# EAGLE board wfipic32host (EAGLE 9.6.2)
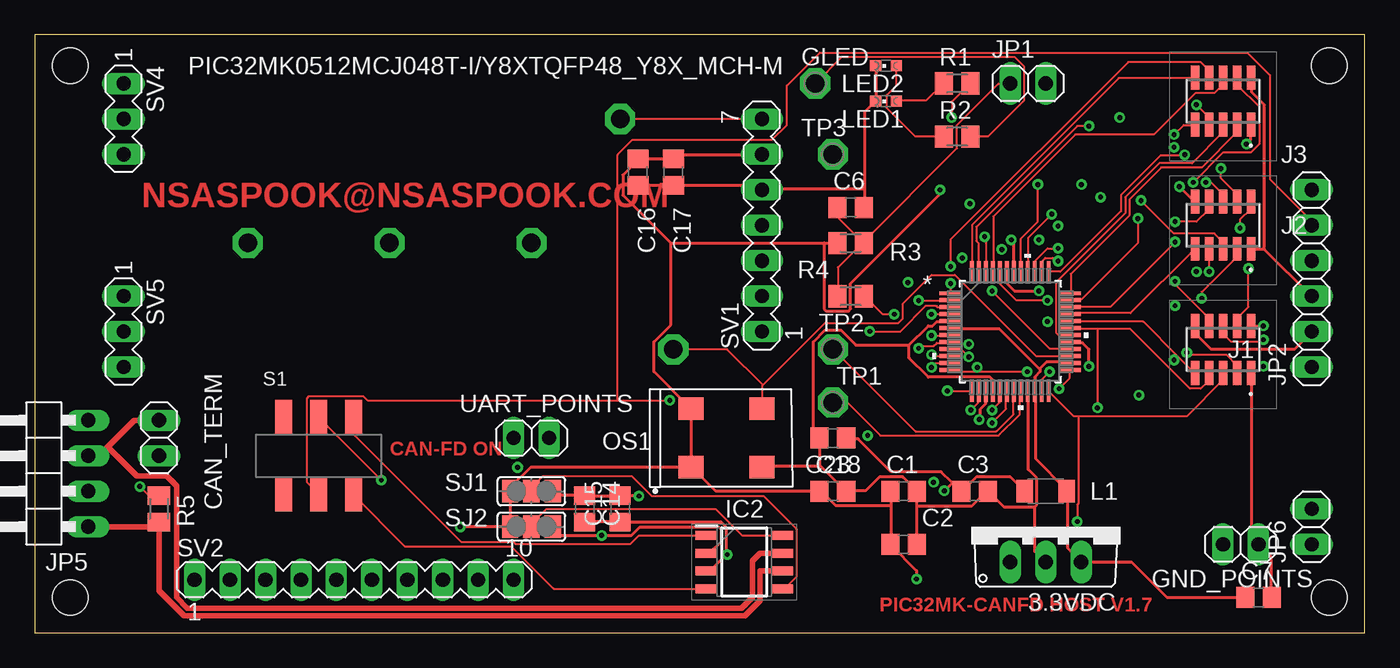
[diagram p0: board, top side]
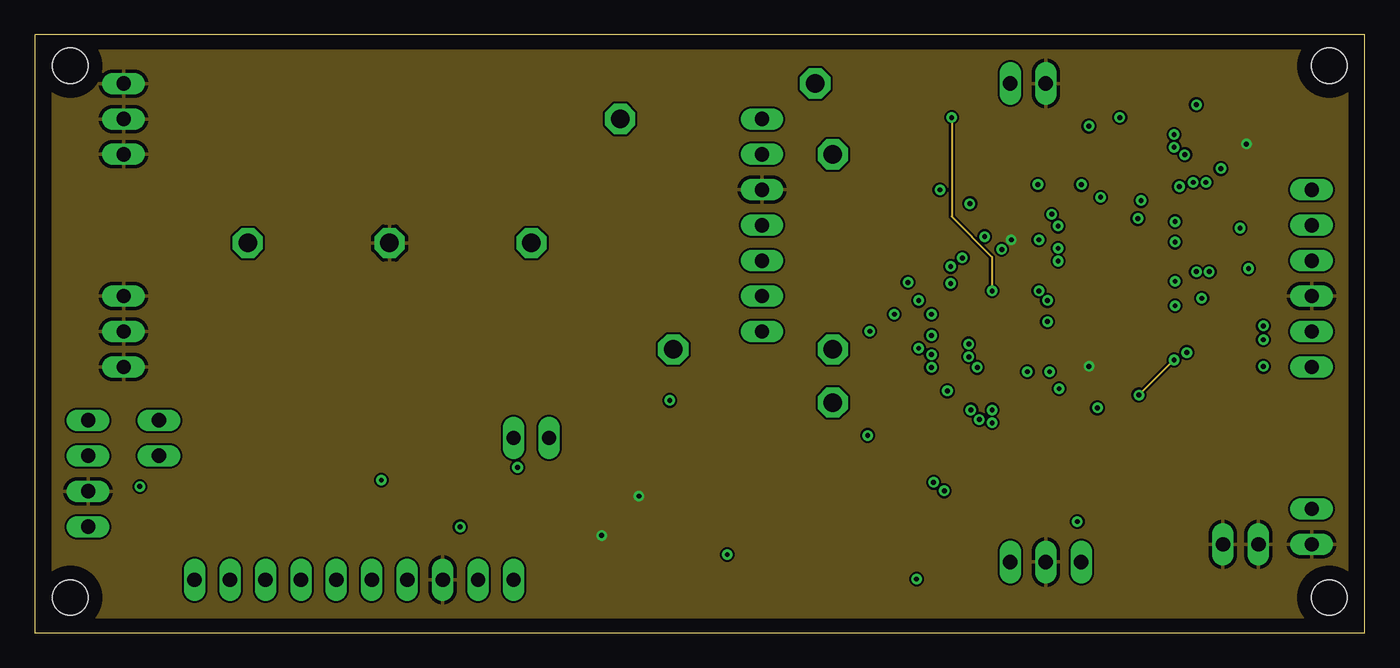
[diagram p1: board, inner layer Route2]
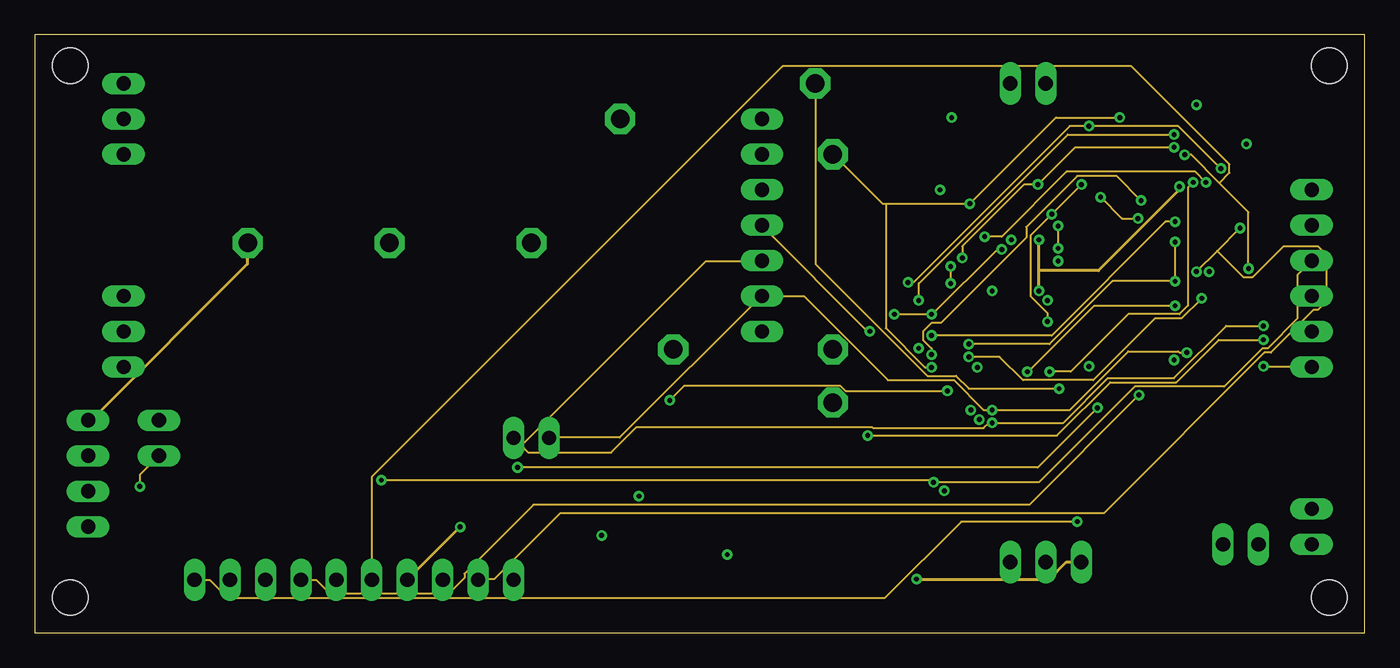
[diagram p2: board, inner layer Route15]
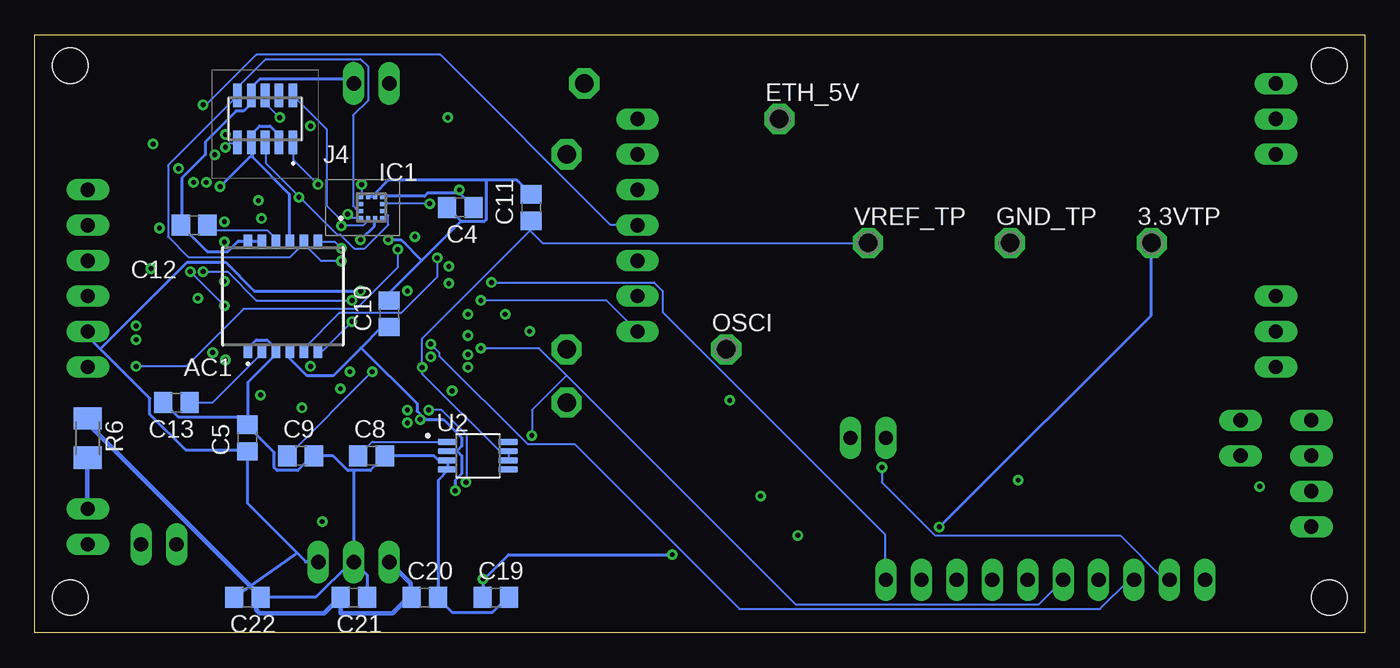
[diagram p3: board, bottom side, seen from below]

Size 95.23 x 42.85 mm. Coordinates in mm from the lower left corner, seen from the top.
Outline: 0,0 95.23,0 95.23,42.85 0,42.85 0,0
Copper layers (1+2*15+16): Top 0.035mm / dielectric 1.5mm / Route2 0.035mm / dielectric 0.15mm / Route15 0.035mm / dielectric 0.2mm / Bottom 0.035mm
Design rules "default *": minimum track width 6mil, minimum drill 0.35mm, track to track 6mil, track to pad 6mil, pad to pad 6mil, via to via 6mil, smd to smd 6mil, copper to edge 40mil, drill to drill 6mil, minimum pad ring 10mil, minimum via ring 8mil, stop-mask expansion 4mil, vias tented up to drill 0mil, thermal gap 10mil
Net classes: 1 icurrent: width 0.305 mm; 2 ncurrent: width 0.203 mm; 3 diff_can: width 0.051 mm
Holes 2.54 mm at 2.54,2.54 2.54,40.64 92.71,40.64 92.71,2.54
vRestrict: area 73.7,20.3 to 81.3,27.9; area 69.8,29.2 to 72.4,31.8; area 62.2,11.4 to 64.8,14; area 16.5,8.9 to 24.1,16.5

## Footprints (pad centres in the part's own frame; a part is rotated, then mirrored left to right if it is on the bottom)
TO220V = drill 1.016 long: 1 -2.54,-2.54; 2 0,-2.54; 3 2.54,-2.54
P1-13 = drill 1.321 pad 2.159 octagon: TP 0,0
SCA3300 = smd 0.61 x 0.98: 1 -2.5,-3.935; 2 -1.5,-3.935; 3 -0.5,-3.935; 4 0.5,-3.935; 5 1.5,-3.935; 6 2.5,-3.935; 7 2.5,3.935; 8 1.5,3.935; 9 0.5,3.935; 10 -0.5,3.935; 11 -1.5,3.935; 12 -2.5,3.935
C0805 = smd 1.3 x 1.5: 1 -0.95,0; 2 0.95,0
1X02 = drill 1.016 long: 1 -1.27,0; 2 1.27,0
BMA490L = smd 0.3 x 0.35: 1 -0.75,-0.775; 2 -0.25,-0.775; 3 0.25,-0.775; 4 0.75,-0.775; 7 0.75,0.775; 8 0.25,0.775; 9 -0.25,0.775; 10 -0.75,0.775 | smd 0.35 x 0.3: 5 0.775,-0.25; 6 0.775,0.25; 11 -0.775,0.25; 12 -0.775,-0.25
SOIC127P600X175-8N = smd 1.528 x 0.65: 1 -2.711,1.905; 2 -2.711,0.635; 3 -2.711,-0.635; 4 -2.711,-1.905; 5 2.711,-1.905; 6 2.711,-0.635; 7 2.711,0.635; 8 2.711,1.905
MLE-105-01-G-DV = smd 0.61 x 1.709: 1 2,-1.685; 2 2,1.685; 3 1,-1.685; 4 1,1.685; 5 0,-1.685; 6 0,1.685; 7 -1,-1.685; 8 -1,1.685; 9 -2,-1.685; 10 -2,1.685
1X06 = drill 1.016 long: 1 -6.35,0; 2 -3.81,0; 3 -1.27,0; 4 1.27,0; 5 3.81,0; 6 6.35,0
1X04/90 = drill 1.016 long: 1 -3.81,-3.81; 2 -1.27,-3.81; 3 1.27,-3.81; 4 3.81,-3.81
L3216C = smd 1.2 x 1.6: 1 -1.5,0; 2 1.5,0
CHIPLED_0603 = smd 0.8 x 0.8: A 0,-0.75; C 0,0.75
7.2X5.2-4-PAD = smd 1.8 x 1.6: 1 -2.54,-2.1; 2 2.54,-2.1; 3 2.54,2.1; 4 -2.54,2.1
M0805 = smd 1.3 x 1.6: 1 -0.95,0; 2 0.95,0
M1206 = smd 1.6 x 2: 1 -1.4,0; 2 1.4,0
SW_JS202011SCQN = smd 1.2 x 2.5: 1 -2.5,-2.75; 2 0,-2.75; 3 2.5,-2.75; 4 -2.5,2.75; 5 0,2.75; 6 2.5,2.75
SJ_2 = smd 1.168 x 1.6: 1 -1.524,0; 2 0,0; 3 1.524,0
MA07-1 = drill 1.016 long: 1 -7.62,0; 2 -5.08,0; 3 -2.54,0; 4 0,0; 5 2.54,0; 6 5.08,0; 7 7.62,0
MA10-1 = drill 1.016 long: 1 -11.43,0; 2 -8.89,0; 3 -6.35,0; 4 -3.81,0; 5 -1.27,0; 6 1.27,0; 7 3.81,0; 8 6.35,0; 9 8.89,0; 10 11.43,0
MA03-1 = drill 1.016 long: 1 -2.54,0; 2 0,0; 3 2.54,0
TQFP48_Y8X_MCH-M = smd 1.549 x 0.279: 1 -4.28,2.75; 2 -4.28,2.25; 3 -4.28,1.75; 4 -4.28,1.25; 5 -4.28,0.75; 6 -4.28,0.25; 7 -4.28,-0.25; 8 -4.28,-0.75; 9 -4.28,-1.25; 10 -4.28,-1.75; 11 -4.28,-2.25; 12 -4.28,-2.75; 25 4.28,-2.75; 26 4.28,-2.25; 27 4.28,-1.75; 28 4.28,-1.25; 29 4.28,-0.75; 30 4.28,-0.25; 31 4.28,0.25; 32 4.28,0.75; 33 4.28,1.25; 34 4.28,1.75; 35 4.28,2.25; 36 4.28,2.75 | smd 0.279 x 1.549: 13 -2.75,-4.28; 14 -2.25,-4.28; 15 -1.75,-4.28; 16 -1.25,-4.28; 17 -0.75,-4.28; 18 -0.25,-4.28; 19 0.25,-4.28; 20 0.75,-4.28; 21 1.25,-4.28; 22 1.75,-4.28; 23 2.25,-4.28; 24 2.75,-4.28; 37 2.75,4.28; 38 2.25,4.28; 39 1.75,4.28; 40 1.25,4.28; 41 0.75,4.28; 42 0.25,4.28; 43 -0.25,4.28; 44 -0.75,4.28; 45 -1.25,4.28; 46 -1.75,4.28; 47 -2.25,4.28; 48 -2.75,4.28
SOP65P490X110-8N = smd 1.42 x 0.47: 1 -2.165,0.975; 2 -2.165,0.325; 3 -2.165,-0.325; 4 -2.165,-0.975; 5 2.165,-0.975; 6 2.165,-0.325; 7 2.165,0.325; 8 2.165,0.975

## Placement (x,y rotation side)
3.3VDC  3.3 Vreg  [TO220V]  72.39,7.62 0 top
3.3VTP  PTR1PAD1-13  [P1-13]  15.24,27.94 0 bottom
AC1  SCA3300-D01-1  [SCA3300]  77.47,24.13 0 bottom
C1  0.1uf  [C0805]  62.23,10.16 0 top
C2  10uf  [C0805]  62.23,6.35 0 top
C3  0.1uf  [C0805]  67.31,10.16 0 top
C4  0.1uf  [C0805]  64.77,30.48 180 bottom
C5  0.1uf  [C0805]  80.01,13.97 90 bottom
C6  0.1uf  [C0805]  58.42,30.48 0 top
C7  10uf  [C0805]  87.63,2.54 0 top
C8  0.1uf  [C0805]  71.12,12.7 0 bottom
C9  0.1uf  [C0805]  76.2,12.7 0 bottom
C10  0.1uf  [C0805]  69.85,22.86 90 bottom
C11  10uf  [C0805]  59.69,30.48 90 bottom
C12  0.01uf  [C0805]  83.82,29.21 180 bottom
C13  0.01uf  [C0805]  85.09,16.51 180 bottom
C14  10uf  [C0805]  39.37,8.89 90 top
C15  0.1uf  [C0805]  41.91,8.89 90 top
C16  10uf  [C0805]  43.18,33.02 270 top
C17  0.1uf  [C0805]  45.72,33.02 270 top
C18  0.1uf  [C0805]  57.15,10.16 0 top
C19  0.1uf  [C0805]  62.23,2.54 0 bottom
C20  0.1uf  [C0805]  67.31,2.54 0 bottom
C21  10uf  [C0805]  72.39,2.54 0 bottom
C22  10uf  [C0805]  80.01,2.54 0 bottom
C23  10uf  [C0805]  57.15,13.97 180 top
CAN_TERM  can term  [1X02]  8.89,13.97 270 top
ETH_5V  PTR1PAD1-13  [P1-13]  41.91,36.83 0 bottom
GLED  PTR1PAD1-13  [P1-13]  55.88,39.37 0 top
GND_POINTS  GND_TEST  [1X02]  86.36,6.35 180 top
GND_TP  PTR1PAD1-13  [P1-13]  25.4,27.94 0 bottom
IC1  BMA490L  [BMA490L]  71.12,30.48 0 bottom
IC2  TCAN330GD  [SOIC127P600X175-8N]  50.8,5.08 0 top
J1  MLE-105-01-G-DV  [MLE-105-01-G-DV]  85.09,20.32 0 top
J2  MLE-105-01-G-DV  [MLE-105-01-G-DV]  85.09,29.21 0 top
J3  MLE-105-01-G-DV  [MLE-105-01-G-DV]  85.09,38.1 0 top
J4  MLE-105-01-G-DV  [MLE-105-01-G-DV]  78.74,36.83 0 bottom
JP1  RESET_JMP  [1X02]  71.12,39.37 0 top
JP2  ICSP  [1X06]  91.44,25.4 90 top
JP5  CAN-FD  [1X04/90]  0,11.43 90 top
JP6  DC12+  [1X02]  91.44,7.62 90 top
L1  100uh  [L3216C]  72.39,10.16 0 top
LED1  RED  [CHIPLED_0603]  60.96,38.1 90 top
LED2  GREEN  [CHIPLED_0603]  60.96,40.64 90 top
OS1  OSC-OE-CFPS-32  [7.2X5.2-4-PAD]  49.53,13.97 0 top
OSCI  PTR1PAD1-13  [P1-13]  45.72,20.32 0 bottom
R1  2k  [M0805]  66.04,39.37 0 top
R2  2k  [M0805]  66.04,35.56 0 top
R3  10k  [M0805]  58.42,27.94 180 top
R4  56  [M0805]  58.42,24.13 0 top
R5  120  [M0805]  8.89,8.89 90 top
R6  0 ohm fuse  [M1206]  91.44,13.97 270 bottom
S1  JS202011SCQN  [SW_JS202011SCQN]  20.32,12.7 0 top
SJ1  can_shdn  [SJ_2]  35.56,10.16 0 top
SJ2  can_s  [SJ_2]  35.56,7.62 0 top
SV1  ETH1  [MA07-1]  52.07,29.21 90 top
SV2  GLCD  [MA10-1]  22.86,3.81 0 top
SV4  ETHG  [MA03-1]  6.35,36.83 270 top
SV5  ETHG  [MA03-1]  6.35,21.59 270 top
TP1  PTR1PAD1-13  [P1-13]  57.15,16.51 0 top
TP2  PTR1PAD1-13  [P1-13]  57.15,20.32 0 top
TP3  PTR1PAD1-13  [P1-13]  57.15,34.29 0 top
U1  PIC32MK0512MCJ048T-I/Y8XTQFP48_Y8X_MCH-M  [TQFP48_Y8X_MCH-M]  69.85,21.59 0 top
U2  MAX6126B30  [SOP65P490X110-8N]  63.5,12.7 0 bottom
UART_POINTS  UART_TEST  [1X02]  35.56,13.97 0 top
VREF_TP  PTR1PAD1-13  [P1-13]  35.56,27.94 0 bottom

## Library data of the parts
3.3VDC = linear
3.3VTP ETH_5V GLED GND_TP OSCI TP1-TP3 VREF_TP = testpad
AC1 = SCA3300-D01-1; AVAILABILITY: In Stock; DESCRIPTION: Accelerometer X, Y, Z Axis ±1.5g, 3g, 6g - -; MF: Murata Electronics; MP: SCA3300-D01-1; PACKAGE: Nonstandard Murata; PRICE: None; PURCHASE-URL: https://pricing.snapeda.com/search/part/SCA3300-D01-1/?ref=eda
C1-C23 = rcl; SPICEPREFIX: C
CAN_TERM GND_POINTS JP1 JP2 JP5 JP6 UART_POINTS = pinhead
IC1 = SamacSys_Parts; DESCRIPTION: Accelerometers High-performance longevity acceleration sensor; HEIGHT: 1mm; MANUFACTURER_NAME: Bosch Sensortec; MANUFACTURER_PART_NUMBER: BMA490L; MOUSER_PART_NUMBER: 262-BMA490L; MOUSER_PRICE-STOCK: https://www.mouser.co.uk/ProductDetail/Bosch-Sensortec/BMA490L?qs=7MVldsJ5UawjTpioRTbJPQ%3D%3D
IC2 = TCAN330GD; DESCRIPTION: 3.3-V CAN Transceivers with CAN FD (Flexible Data Rate); HEIGHT: 1.75mm; MANUFACTURER_NAME: Texas Instruments; MANUFACTURER_PART_NUMBER: TCAN330GD; MOUSER_PART_NUMBER: 595-TCAN330GD; MOUSER_PRICE-STOCK: https://www.mouser.co.uk/ProductDetail/Texas-Instruments/TCAN330GD?qs=9DwIlvx97ae6H3qgocd9Aw%3D%3D
J1-J4 = MLE-105-01-G-DV; DESCRIPTION: 10 Position, 1.00 mm Tiger Beam&trade; Cost-Effective Single Beam Socket Strip; HEIGHT: mm; MANUFACTURER_NAME: SAMTEC; MANUFACTURER_PART_NUMBER: MLE-105-01-G-DV; MOUSER_PART_NUMBER: 200-MLE10501GDV; MOUSER_PRICE-STOCK: https://www.mouser.co.uk/ProductDetail/Samtec/MLE-105-01-G-DV?qs=rU5fayqh%252BE2dXiDvl4XeQQ%3D%3D
L1 = rcl; SPICEPREFIX: L
LED1 LED2 = led
OS1 = IQD-Frequency-Products
R1-R6 = rcl; SPICEPREFIX: R
S1 = JS202011SCQN_fixed; AVAILABILITY: Unavailable; DESCRIPTION: JS Series DPDT On-On Gull Wing Surface Mount Subminiature Slide Switch; MF: C&K; MP: JS202011SCQN; PACKAGE: None; PRICE: None
SJ1 SJ2 = jumper
SV1 SV2 SV4 SV5 = con-lstb; OC_FARNELL: unknown; OC_NEWARK: unknown
U1 = 2022-08-07_22-50-41_Library; COPYRIGHT: Copyright (C) 2022 Ultra Librarian. All rights reserved.; MANUFACTURER_PART_NUMBER: PIC32MK0512MCJ048T-I/Y8X; MFR_NAME: Microchip
U2 = MAX6126B30; DESCRIPTION: Series Voltage Reference IC Fixed 3V V ±0.1% 10 mA 8-uMAX-EP|8-uSOP-EP; DIGI-KEY_PART_NUMBER: MAX6126B30+T-ND; MF: Maxim Integrated; MP: MAX6126B30+T; PACKAGE: MICRO MAX-8 Maxim; PURCHASE-URL: https://pricing.snapeda.com/search/part/MAX6126B30+T/?ref=eda

## Nets
AN0: J2.3 U1.9
AN1: J2.5 U1.10
AVDD [ncurrent]: AC1.4 C3.1 C10.1 C23.1 L1.1 U1.15 U2.2
BMA_INT2: IC1.6 J4.6 TP3.TP U1.11
CAN_N [diff_can]: IC2.6 JP5.1 R5.1
CAN_P [diff_can]: CAN_TERM.1 IC2.7 JP5.3
DAC1: J2.9 U1.33
DC_IN [icurrent]: JP6.2 R6.2
DC_INPUT [icurrent]: 3.3VDC.1 C20.1 C21.1 R6.1
DIS_CS: J1.6 SV2.5 U1.8
DIS_MODE: J1.9 SV2.4 U1.32
DIS_RESET: J1.4 SV2.6 U1.37
EXT_INT2: IC1.5 J4.5 U1.35
EXT_SW2: J2.8 U1.7
GREEN_LED: GLED.TP R2.2 U1.25
IMU_CS: AC1.5 IC1.10 J4.9 U1.41
INDX2: J2.6 U1.46
MCLR_SIG: JP2.1 R4.2 U1.4
N$1: LED1.A R1.1
N$2: LED2.A R2.1
N$3: C6.1 JP1.1 R3.1 R4.1
N$4: C8.1 U2.1
N$5: TP1.TP U1.20
N$6: TP2.TP U1.19
N$7: AC1.10 C12.1
N$8: ETH_5V.TP SV1.7
N$9: AC1.2 C13.1
N$10: IC2.1 S1.6
N$11: IC2.4 S1.3
N$12: IC2.5 SJ1.2
N$13: IC2.8 SJ2.2
N$15: CAN_TERM.2 R5.2
OSC_MCU: OS1.3 OSCI.TP U1.27
PGC_C1RX: JP2.5 S1.2 U1.13
PGD_C1TX: JP2.4 S1.5 U1.14
PWM1EN: J3.5 U1.30
PWM1ER: J3.3 U1.36
PWM1H: J3.9 SV1.1 U1.2
PWM1L: J3.7 SV1.4 U1.3
PWM4EN: J3.6 U1.45
PWM4ER: J3.4 U1.23
PWM4H: J3.10 U1.48
PWM4L: J3.8 U1.1
QEA2: J2.2 SV2.9 U1.44
QEB2: J2.4 SV2.10 U1.47
RED_LED: R1.2 U1.28
SCK1: J1.8 SV2.3 U1.34
SCK2: AC1.8 IC1.12 J4.10 U1.38
SDI1: J1.5 SV2.1 U1.24
SDI2: AC1.6 IC1.1 J4.1 U1.40
SDO1: J1.7 SV2.2 U1.31
SDO2: AC1.7 IC1.2 J4.2 U1.39
U1RX: J1.2 SV1.3 U1.18 UART_POINTS.1
U1TX: J1.3 SV1.2 U1.17 UART_POINTS.2
VDD [ncurrent]: 3.3VDC.3 3.3VTP.TP AC1.9 C1.1 C2.1 C4.1 C5.1 C7.1 C14.1 C15.1 C16.1 C17.1 C18.1 C19.1 C22.1 IC1.3 IC1.7 IC2.3 J1.10 J2.10 J4.3 J4.7 JP2.2 JP5.4 L1.2 OS1.1 OS1.4 R3.2 SJ1.1 SJ2.1 SV1.6 SV2.7 U1.6 U1.22 U1.26 U1.43
VREF+: C9.1 C11.1 J2.7 U1.12 U2.6 U2.7 VREF_TP.TP
VSS [ncurrent]: 3.3VDC.2 AC1.1 AC1.3 AC1.11 AC1.12 C1.2 C2.2 C3.2 C4.2 C5.2 C6.2 C7.2 C8.2 C9.2 C10.2 C11.2 C12.2 C13.2 C14.2 C15.2 C16.2 C17.2 C18.2 C19.2 C20.2 C21.2 C22.2 C23.2 GND_POINTS.1 GND_POINTS.2 GND_TP.TP IC1.8 IC1.9 IC2.2 J1.1 J2.1 J3.1 J3.2 J4.8 JP1.2 JP2.3 JP5.2 JP6.1 LED1.C LED2.C OS1.2 SJ1.3 SJ2.3 SV1.5 SV2.8 SV4.1 SV4.2 SV4.3 SV5.1 SV5.2 SV5.3 U1.5 U1.16 U1.21 U1.29 U1.42 U2.3 U2.4

## Tracks (layer width: path | path; a pad name or v marks a point on that pad's centre or on a via)
AN0  (via drill 0.35)
  Top 0.152: v66.88,19.79 66.34,20.32 65.58,20.32 U1.9 | v83.57,23.98 83.57,24.44 86.08,26.95 86.08,27.48 J2.3
  Route15 0.152: v66.88,19.79 69.09,19.79 70.76,18.11 75.79,18.11 80.21,22.53 82.12,22.53 v83.57,23.98
AN1  (via drill 0.35)
  Top 0.152: v64.21,19.94 64.29,19.86 65.51,19.86 U1.10 | v79.22,30.99 81.59,28.63 84.48,28.63 85.09,28.02 J2.5
  Route15 0.152: v64.21,19.94 64.21,20.4 63.6,21.01 63.6,21.62 64.21,22.23 64.9,22.23 70.99,28.32 70.99,29.08 74.65,32.74 77.47,32.74 v79.22,30.99
AVDD  (via drill 0.35)
  Top 0.203: L1.1 70.84,10.18 69.85,11.18 67.41,11.18 66.42,10.18 C3.1 66.27,10.18 65.7,10.76 | 65.7,10.76 64.9,11.56 61.32,11.56 58.95,13.92 58.12,13.92 C23.1 | v67.64,15.29 67.72,15.37 67.72,16.05 68.1,16.43 68.1,17.27 U1.15 | v65.13,10.18 65.7,10.76
  Bottom 0.203: 71.87,20.43 70.46,21.84 69.85,21.84 C10.1 | 71.87,20.43 73.89,18.41 75.72,18.41 76.94,19.63 76.94,20.17 AC1.4 | 67.45,15.48 67.87,15.9 67.87,16.43 71.87,20.43 | 67.45,15.48 67.26,15.29 65.96,15.29 64.67,13.99 64.67,13.39 64.97,13.08 65.66,13.08 U2.2 64.97,13 64.67,12.7 64.67,11.4 65.13,10.95 v65.13,10.18 | 67.45,15.48 v67.64,15.29
BMA_INT2  (via drill 0.35)
  Top 0.152: v64.21,19.02 64.52,19.33 65.51,19.33 U1.11
  Route15 0.152: 60.94,30.76 60.71,30.76 57.2,34.27 TP3.TP | 60.94,30.76 v66.95,30.76 73.13,36.93 v77.7,36.93 | v64.21,19.02 63.75,19.02 60.94,21.84 60.94,30.76
  Bottom 0.152: v66.95,30.76 70.31,30.76 IC1.6 | v77.7,36.93 78.69,37.92 78.69,38.46 J4.6
CAN_N
  Top 0.406: IC2.6 51.93,4.45 51.93,2.31 50.84,1.22 10.69,1.22 8.89,3.02 8.89,7.62 | 8.89,7.62 R5.1 | JP5.1 8.89,7.62
CAN_P
  Top 0.406: IC2.7 51.93,5.71 51.38,5.16 51.38,2.54 50.61,1.78 10.92,1.78 10.16,2.54 10.16,10.52 9.44,11.24 7.3,11.24 5.21,13.33 | 5.21,13.33 4.83,12.95 4.06,12.95 JP5.3 | 5.21,13.33 7.11,15.24 CAN_TERM.1
DAC1
  Top 0.152: U1.33 74.19,22.91 78.46,22.91 83.03,27.48 J2.9
DC_IN
  Bottom 0.305: R6.2 91.49,12.55 91.49,8.89 JP6.2
DC_INPUT
  Bottom 0.305: 3.3VDC.1 68.33,3.56 68.33,2.56 C20.1 68.48,2.56 69.62,1.42 73.34,1.42 C21.1 73.43,2.49 74.5,1.42 79.15,1.42 79.38,1.65 79.38,2.95 91.41,14.99 91.41,15.37 R6.1
DIS_CS  (via drill 0.35)
  Top 0.152: v63.3,20.4 63.45,20.55 64.36,20.55 64.59,20.78 65.51,20.78 U1.8 | J1.6 85.09,21.46 85.7,20.85 87.83,20.85 v87.99,21.01
  Route15 0.152: v87.99,21.01 84.78,21.01 81.74,17.96 77.01,17.96 73.2,14.15 v59.64,14.15
  Bottom 0.152: v63.3,20.4 59.11,20.4 57.16,18.45 | 57.16,18.45 40.74,2.03 23.37,2.03 SV2.5 | v59.64,14.15 59.64,15.98 57.16,18.45
DIS_MODE  (via drill 0.35)
  Top 0.152: 81.85,19.82 83.03,18.64 J1.9 | 81.85,19.82 79.38,22.3 74.19,22.3 U1.32 | 81.85,19.82 v81.59,19.56
  Route2 0.152: v81.59,19.56 v79.07,17.04
  Route15 0.152: v79.07,17.04 71.22,9.2 35.71,9.2 30.76,4.24 30.76,3.94 29.62,2.79 21.16,2.79 20.17,3.79 19.1,3.79 SV2.4
DIS_RESET  (via drill 0.35)
  Top 0.152: v82.35,34.27 82.27,34.19 80.59,34.19 77.78,31.37 77.78,30.23 73.43,25.88 72.67,25.88 U1.37 | v86.92,26.11 86.92,23.37 86.16,22.61 86.16,22.07 J1.4
  Route15 0.152: v82.35,34.27 82.8,34.27 84.82,32.24 | 84.82,32.24 86.92,30.15 v86.92,26.11 | SV2.6 24.13,11.18 53.54,40.59 78.54,40.59 85.55,33.58 85.55,32.97 84.82,32.24
EXT_INT2  (via drill 0.35)
  Top 0.152: v78.99,29.69 78.99,27.94 74.95,23.9 74.19,23.9 U1.35
  Route15 0.152: v78.99,29.69 77.85,29.69 v76.33,31.22
  Bottom 0.152: 76.29,31.25 78.69,33.66 78.69,35.1 J4.5 | 76.29,31.25 73.58,28.55 73.36,28.55 72.37,27.56 71.6,27.56 69.93,29.23 69.93,29.92 70.23,30.23 70.31,30.23 IC1.5 | v76.33,31.22 76.29,31.25
EXT_SW2  (via drill 0.35)
  Top 0.152: v64.21,21.31 65.51,21.31 U1.7 | v81.66,29.46 83.19,29.46 84.02,30.3 84.02,30.84 J2.8
  Route15 0.152: v64.21,21.31 72.82,21.31 80.97,29.46 v81.66,29.46
GREEN_LED  (via drill 0.35)
  Top 0.152: v73.36,17.5 74.12,18.26 74.12,18.8 U1.25 | R2.2 68.25,35.56 70.84,38.15 70.84,40.59 70.16,41.27 57.81,41.27 55.91,39.37 GLED.TP
  Route15 0.152: v73.36,17.5 66.88,17.5 65.96,18.41 63.91,18.41 55.91,26.42 55.91,39.37 GLED.TP
IMU_CS  (via drill 0.35)
  Top 0.152: v71.83,32.13 71.83,29.46 70.61,28.24 70.61,25.88 U1.41
  Route15 0.152: v66.42,26.87 66.42,27.71 70.84,32.13 v71.83,32.13 74.5,34.8 v81.59,34.8
  Bottom 0.152: v71.83,32.13 71.83,31.29 IC1.10 | v66.42,26.87 66.42,25.5 69.01,22.91 73.43,22.91 75.95,20.4 75.95,20.24 AC1.5 | v81.59,34.8 81.28,35.1 80.75,35.1 J4.9
INDX2  (via drill 0.35)
  Top 0.152: v68.02,28.4 68.1,28.32 68.1,25.88 U1.46 | v83.87,32.28 84.25,32.28 85.09,31.45 J2.6
  Route15 0.152: v68.02,28.4 69.24,28.4 73.89,33.05 83.11,33.05 v83.87,32.28
MCLR_SIG  (via drill 0.35)
  Top 0.152: v64.21,22.84 65.51,22.84 U1.4 | v61.54,22.84 60.71,22.84 59.41,24.13 R4.2
  Route15 0.152: v61.54,22.84 v64.21,22.84 64.29,22.84 68.94,27.48 v69.24,27.48 | v87.99,19.1 91.41,19.1 JP2.1
  Bottom 0.152: v87.99,19.1 84.4,19.1 80.29,23.22 72.21,23.22 69.24,26.19 v69.24,27.48
N$1
  Top 0.152: LED1.A 61.77,38.15 63.83,38.15 65.05,39.37 R1.1
N$2
  Top 0.152: R2.1 63.07,35.56 61.01,37.62 61.01,38.53 61.7,39.22 61.7,40.59 LED2.A
N$3
  Top 0.152: C6.1 57.51,30.45 57.51,29.77 59.33,27.94 R3.1 | R4.1 57.51,24.13 57.51,26.19 59.26,27.94 R3.1 | JP1.1 69.01,39.37 66.04,36.4 66.04,34.72 59.33,28.02 R3.1
N$4
  Bottom 0.152: U2.1 65.73,13.69 71.07,13.69 C8.1
N$5
  Top 0.152: TP1.TP 58.19,16.51 60.55,14.15 69.01,14.15 70.54,15.67 70.54,17.27 U1.20
N$6
  Top 0.152: U1.19 70.08,17.27 70.08,15.67 68.86,14.45 63.07,14.45 57.2,20.32 TP2.TP
N$7
  Bottom 0.152: AC1.10 78,28.09 78,28.24 78.61,28.85 82.5,28.85 82.8,29.16 C12.1
N$8
  Top 0.152: SV1.7 52.02,36.85 41.96,36.85 ETH_5V.TP
N$9
  Bottom 0.152: C13.1 82.5,16.51 78.99,20.02 78.99,20.17 AC1.2
N$10
  Top 0.152: IC2.1 43.26,6.98 42.65,6.38 34.42,6.38 34.27,6.53 30.53,6.53 22.84,14.22 22.84,15.44 S1.6
N$11
  Top 0.152: IC2.4 37.16,3.17 34.11,6.22 26.49,6.22 22.84,9.88 S1.3
N$12
  Top 0.152: IC2.5 53.7,3.17 54.53,4.01 54.53,7.44 52.17,9.8 44.17,9.8 42.72,11.25 36.4,11.25 35.56,10.41 SJ1.2
N$13
  Top 0.152: IC2.8 50.65,6.98 48.74,8.89 36.63,8.89 35.56,7.82 SJ2.2
N$15  (via drill 0.35)
  Top 0.152: v7.52,10.49 8.13,9.88 8.89,9.88 R5.2
  Route15 0.152: v7.52,10.49 7.52,11.33 CAN_TERM.2
OSC_MCU
  Top 0.152: 52.13,17.77 52.09,17.73 52.09,16.13 OS1.3 | 52.13,17.77 56.59,22.23 61.85,22.23 62.15,22.53 62.15,23.6 64.21,25.65 65.89,25.65 71.68,19.86 74.12,19.86 U1.27 | OSCI.TP 49.58,20.32 52.13,17.77
PGC_C1RX  (via drill 0.35)
  Top 0.152: v65.35,17.35 67.03,17.35 U1.13 | 41.73,16.66 23.83,16.66 23.52,16.97 19.63,16.97 19.48,16.81 19.48,10.79 S1.2 | 41.73,16.66 v45.47,16.66 | 41.73,16.66 41.73,34.27 42.8,35.33 52.78,35.33 53.85,36.4 53.85,39.22 56.21,41.58 86.84,41.58 88.44,39.98 88.44,32.51 91.41,29.54 91.41,29.23 JP2.5
  Route15 0.152: v65.35,17.35 58.04,17.35 57.66,17.73 46.53,17.73 v45.47,16.66
PGD_C1TX  (via drill 0.35)
  Top 0.152: v67.03,15.98 67.56,16.51 67.56,17.27 U1.14 | v24.82,10.95 S1.5
  Route15 0.152: JP2.4 90.42,25.65 90.42,22.53 88.29,20.4 87.91,20.4 85.17,17.65 78.77,17.65 71.91,10.79 v64.36,10.79 64.21,10.95 v24.82,10.95
  Bottom 0.152: v67.03,15.98 66.12,15.98 64.29,14.15 64.29,10.87 v64.36,10.79
PWM1EN
  Top 0.152: J3.5 85.09,35.87 82.88,33.66 80.52,33.66 78.08,31.22 78.08,30.07 73.13,25.12 73.13,21.54 73.28,21.39 74.12,21.39 U1.30
PWM1ER
  Top 0.152: U1.36 74.19,24.36 74.19,25.73 78.38,29.92 78.38,31.06 80.67,33.35 83.57,33.35 86.08,35.87 86.08,36.4 J3.3
PWM1H  (via drill 0.35)
  Top 0.152: v63.3,23.82 65.51,23.82 U1.2 | v81.59,35.71 82.27,36.4 83.03,36.4 J3.9
  Route15 0.152: v81.59,35.71 73.97,35.71 63.3,25.04 v63.3,23.82
  Bottom 0.152: v63.3,23.82 54.3,23.82 SV1.1
PWM1L  (via drill 0.35)
  Top 0.152: v59.79,21.62 62,21.62 63.83,23.44 64.52,23.44 64.59,23.37 65.51,23.37 U1.3 | v83.19,37.85 84.02,37.01 84.02,36.47 J3.7
  Route15 0.152: v59.79,21.62 59.64,21.62 52.09,29.16 SV1.4
  Bottom 0.152: v83.19,37.85 82.96,37.85 79.38,41.43 66.19,41.43 54,29.23 52.09,29.23 SV1.4
PWM4EN
  Top 0.152: J3.6 85.09,39.29 84.48,38.68 83.11,38.68 80.14,35.71 74.5,35.71 68.63,29.84 68.63,25.88 U1.45
PWM4ER  (via drill 0.35)
  Top 0.152: v72.67,18.72 72.14,18.19 72.14,17.35 U1.23 | v82.96,32.28 85.09,34.42 87.07,34.42 87.68,35.03 87.68,37.69 86.16,39.22 86.16,39.75 J3.4
  Route15 0.152: v72.67,18.72 74.19,18.72 78.31,22.84 81.97,22.84 82.58,23.44 82.58,31.9 v82.96,32.28
PWM4H
  Top 0.152: U1.48 67.11,25.88 67.11,29.23 77.62,39.75 83.03,39.75 J3.10
PWM4L  (via drill 0.35)
  Top 0.152: v65.58,25.04 65.58,24.36 U1.1 | v65.58,26.26 65.58,28.17 78.31,40.89 83.49,40.89 84.02,40.36 84.02,39.83 J3.8
  Route15 0.152: v65.58,26.26 v65.58,25.04
QEA2  (via drill 0.35)
  Top 0.152: v72.52,23.82 70.31,23.82 69.16,24.97 69.16,25.81 U1.44 | v86.31,29.01 86.31,29.62 87.07,30.38 87.07,30.84 J2.2
  Route15 0.152: v86.31,29.01 84.67,27.37 | 84.67,27.37 v83.19,25.88 | 84.67,27.37 86.54,25.5 87.22,25.5 89.43,27.71 91.87,27.71 92.48,27.1 92.48,23.75 91.87,23.14 91.57,23.14 88.52,20.09 88.06,20.09 76.56,8.58 37.62,8.58 32.89,3.86 31.75,3.86 SV2.9
  Bottom 0.152: v72.52,23.82 79.38,23.82 81.43,25.88 v83.19,25.88
QEB2  (via drill 0.35)
  Top 0.152: v75.49,36.32 74.65,36.32 67.41,29.08 67.41,28.09 67.56,27.94 67.56,25.88 U1.47 | v84.94,33.27 84.94,32.59 86.08,31.45 86.08,30.91 J2.4
  Route15 0.152: v84.94,33.27 81.89,36.32 v75.49,36.32 74.12,36.32 62.92,25.12 v62.54,25.12
  Bottom 0.152: v62.54,25.12 50.88,25.12 50.27,24.51 50.27,22.99 34.34,7.06 34.34,3.86 SV2.10
RED_LED  (via drill 0.35)
  Top 0.152: v68.56,24.51 72.67,20.4 74.12,20.4 U1.28 | v65.66,36.93 65.66,38.07 66.95,39.37 R1.2
  Route2 0.152: v68.56,24.51 68.56,26.95 65.66,29.84 v65.66,36.93
SCK1  (via drill 0.35)
  Top 0.152: v81.66,28.02 77.01,23.37 74.19,23.37 U1.34 | v81.66,25.2 81.66,24.97 84.02,22.61 84.02,22.07 J1.8
  Route15 0.152: v81.66,28.02 v81.66,25.2 77.17,25.2 72.67,20.7 v66.88,20.7
  Bottom 0.152: v66.88,20.7 66.27,20.09 66.27,19.86 59.94,13.54 56.59,13.54 44.78,1.73 18.95,1.73 16.89,3.79 16.51,3.79 SV2.3
SCK2  (via drill 0.35)
  Top 0.152: v73.28,26.64 73.13,26.64 72.9,26.87 72.37,26.87 72.14,26.64 72.14,25.88 U1.38
  Bottom 0.152: v73.28,26.64 74.73,26.64 75.95,27.86 75.95,28.02 AC1.8 75.95,27.79 76.1,27.79 76.94,26.95 84.25,26.95 85.7,28.4 85.7,33.5 80.75,38.46 J4.10 80.67,38.53 80.67,39.14 78.69,41.12 71.91,41.12 71.37,40.59 71.37,38.15 72.44,37.08 72.44,30.61 72.14,30.3 71.91,30.3 IC1.12
SDI1  (via drill 0.35)
  Top 0.152: 74.73,15.52 82.5,15.52 85.09,18.11 J1.5 | 74.73,15.52 74.42,15.52 72.67,17.27 U1.24 | v74.65,7.98 74.65,9.2 74.73,9.27 74.73,15.52
  Route15 0.152: v74.65,7.98 66.34,7.98 60.86,2.49 13.84,2.49 12.55,3.79 11.48,3.79 SV2.1
SDI2  (via drill 0.35)
  Top 0.152: v72.82,30 71.14,28.32 71.14,25.88 U1.40
  Route15 0.152: v72.52,22.3 72.52,22.91 71.3,24.13 71.3,28.47 v72.82,30 v74.95,32.13
  Bottom 0.152: v72.82,30 72.59,29.77 71.91,29.77 IC1.1 | v72.52,22.3 74.57,20.24 74.95,20.24 AC1.6 | v74.95,32.13 76.71,33.88 76.71,35.1 J4.1
SDO1  (via drill 0.35)
  Top 0.152: 76.1,21.77 78.46,21.77 82.73,17.5 83.49,17.5 84.02,18.03 84.02,18.57 J1.7 | 76.1,21.77 74.19,21.77 U1.31 | 76.1,21.77 v76.1,16.13
  Route15 0.152: v34.57,11.86 71.83,11.86 v76.1,16.13
  Bottom 0.152: v34.57,11.86 34.57,10.79 30.76,6.98 17.5,6.98 14.38,3.86 14,3.86 SV2.2
SDO2  (via drill 0.35)
  Top 0.152: v73.28,27.56 72.52,27.56 71.6,26.64 71.6,25.88 U1.39
  Route15 0.152: v73.28,29.16 v73.28,27.56
  Bottom 0.152: v73.28,27.56 73.74,28.02 74.95,28.02 AC1.7 | 73.09,29.35 74.35,30.61 74.35,36.09 76.71,38.46 J4.2 | 73.09,29.35 72.97,29.23 71.68,29.23 71.37,29.54 IC1.2 | 73.09,29.35 v73.28,29.16
U1RX  (via drill 0.35)
  Top 0.152: v68.56,15.06 69.55,16.05 69.55,17.27 U1.18 | v87.99,22 87.15,22 J1.2
  Route15 0.152: UART_POINTS.1 34.84,13.42 | 34.84,13.42 35.33,12.93 41.28,12.93 43.1,14.76 59.94,14.76 60.02,14.68 67.95,14.68 68.33,15.06 v68.56,15.06 73.66,15.06 76.86,18.26 81.59,18.26 85.32,22 v87.99,22 | 34.84,13.42 48.06,26.64 52.02,26.64 SV1.3
U1TX  (via drill 0.35)
  Top 0.152: v68.56,15.98 69.09,16.51 69.09,17.27 U1.17 | v82.5,20.09 82.65,19.94 85.32,19.94 86.08,19.18 86.08,18.64 J1.3
  Route15 0.152: v82.5,20.09 81.97,20.09 81.89,20.17 78.31,20.17 74.12,15.98 v68.56,15.98 67.95,15.98 65.81,18.11 61.09,18.11 55.07,24.13 SV1.2 52.02,24.13 41.89,13.99 36.86,13.99 UART_POINTS.2
VDD  (via drill 0.35)
  Top 0.203: v71.91,24.51 70.16,24.51 69.62,25.04 69.62,25.81 U1.43 | v81.97,31.98 83.03,30.91 J2.10 | 71.98,18.95 71.98,18.72 71.6,18.34 71.6,17.35 U1.22 71.68,17.27 71.68,12.47 73.89,10.26 L1.2 73.97,10.11 73.97,6.07 74.88,5.16 3.3VDC.3 78.54,5.08 81.05,2.56 86.61,2.56 C7.1 | 71.98,18.95 72.44,19.41 74.12,19.41 U1.26 | U1.6 65.58,21.77 69.09,21.77 71.91,18.95 71.98,18.95 | J1.10 83.11,22 83.11,21.46 84.25,20.32 90.19,20.32 91.41,21.54 JP2.2 | 45.54,27.94 56.52,27.94 | 56.52,27.94 R3.2 | 45.54,27.94 42.11,31.37 42.11,32.82 43.18,33.88 C16.1 45.7,33.96 C17.1 45.77,34.04 46,34.27 52.02,34.27 SV1.6 | v64.82,31.75 64.82,31.45 58.42,25.04 58.42,23.22 58.27,23.06 56.67,23.06 56.52,23.22 56.52,27.94 | C14.1 39.37,7.98 41.89,7.98 C15.1 41.96,7.98 49.12,7.98 49.51,7.59 49.51,5.61 | 49.51,5.61 48.36,4.47 48.13,4.47 IC2.3 | 61.32,9.12 61.32,10.11 C1.1 | 61.32,9.12 61.32,6.38 C2.1 61.32,6.3 63.14,4.47 v63.14,3.86 | 61.32,9.12 57.35,9.12 56.36,10.11 56.21,10.11 C18.1 56.13,10.18 48.74,10.18 47.07,11.86 OS1.1 | v49.58,5.61 49.51,5.61 | OS1.1 OS1.4 46.91,16.13 44.32,18.72 44.32,20.85 45.54,22.07 45.54,27.94 | OS1.1 46.91,11.86 35.48,11.86 34.11,10.49 34.11,10.18 SJ1.1 SJ2.1 33.96,7.59 v30.46,7.59
  Route15 0.203: v71.91,24.51 71.91,25.96 | 71.91,25.96 v71.91,28.17 | 71.91,25.96 76.17,25.96 81.97,31.75 v81.97,31.98 | JP5.4 3.86,15.29 4.09,15.29 15.22,26.42 15.22,27.94 3.3VTP.TP | v30.46,7.59 SV2.7 | 3.3VDC.3 73.89,5.08 72.67,3.86 v63.14,3.86
  Bottom 0.203: v71.91,28.17 70.92,29.16 70.92,29.69 IC1.3 | 79.68,34.19 79.68,35.1 J4.7 79.68,35.18 79.68,35.79 79.15,36.32 78.38,36.32 77.78,35.71 77.78,35.18 J4.3 | 79.68,34.19 79.68,34.11 77.01,31.45 77.01,28.09 AC1.9 | v81.97,31.98 79.76,34.19 79.68,34.19 | 3.3VDC.3 75.87,5.08 75.87,5.16 76.46,5.75 | 76.46,5.75 C22.1 | 76.46,5.75 79.98,9.27 79.98,13 C5.1 80.06,13.08 84.4,13.08 87,15.67 87,16.81 90.54,20.36 | 90.54,20.36 91.41,21.23 91.41,21.54 JP2.2 | v71.91,24.51 79.53,24.51 81.59,26.57 84.33,26.57 90.54,20.36 | 64.82,31.52 67.11,31.52 67.34,31.29 70.31,31.29 IC1.7 | 64.82,31.52 63.83,30.53 C4.1 | v64.82,31.75 64.82,31.52 | C19.1 63.14,2.56 v63.14,3.86 63.07,3.86 61.32,5.61 v49.58,5.61 | v30.46,7.59 15.29,22.76 15.29,27.94 3.3VTP.TP
VREF+  (via drill 0.35)
  Top 0.152: 67.49,18.72 65.66,18.72 65.58,18.8 U1.12 | 67.49,18.72 v71.07,18.72 | v84.1,25.88 84.1,27.48 J2.7 | v67.49,19.02 67.49,18.72
  Route15 0.152: v81.66,23.44 75.87,23.44 71.14,18.72 v71.07,18.72
  Bottom 0.152: v71.07,18.72 77.09,12.7 C9.1 | v81.66,23.44 v84.1,25.88 | U2.6 61.32,12.39 61.32,13 U2.7 61.39,13.08 62,13.08 67.49,18.57 v67.49,19.02 67.49,21.08 59.75,28.82 | 59.75,28.82 59.72,28.85 59.72,29.46 C11.1 | VREF_TP.TP 58.88,27.94 59.75,28.82
VSS  (via drill 0.35)
  Top 0.203: 62.61,20.62 63.98,22 64.29,22 64.59,22.3 65.51,22.3 U1.5 | 62.61,20.62 62.61,19.71 63.98,18.34 68.4,18.34 68.56,18.19 68.56,17.35 U1.16 | 56.21,12.01 56.21,13.92 C23.2 56.21,14.07 55.75,14.53 55.75,20.85 56.59,21.69 57.73,21.69 58.8,20.62 62.61,20.62 | 56.21,12.01 58.04,10.18 C18.2 58.19,10.18 59.49,10.18 60.48,11.18 62.15,11.18 63.14,10.18 C1.2 63.14,10.11 63.14,9.12 | OS1.2 52.09,11.94 56.21,11.94 56.21,12.01 | 63.14,9.12 63.14,6.38 C2.2 | 63.14,9.12 67.11,9.12 68.1,10.11 68.25,10.11 C3.2 68.33,10.11 69.39,9.04 71.6,9.04 | 71.6,9.04 71.75,9.2 71.75,11.1 71.14,11.71 71.14,17.27 U1.21 | IC2.2 48.13,5.77 48.36,5.77 49.12,6.53 49.12,7.44 48.97,7.59 43.33,7.59 42.72,6.98 v40.59,6.98 37.69,6.98 37.08,7.59 SJ2.3 | LED2.C 60.25,40.59 60.25,38.15 LED1.C 60.17,38.07 59.41,37.31 59.41,31.83 | 59.41,31.83 59.41,30.53 C6.2 | SJ1.3 37.08,10.11 37.31,9.88 39.37,9.88 C14.2 39.45,9.8 41.89,9.8 C15.2 41.96,9.8 v43.26,9.8 | C16.2 43.18,32.05 45.7,32.05 C17.2 45.77,32.05 51.71,32.05 52.02,31.75 SV1.5 52.09,31.83 59.41,31.83 | C7.2 88.52,2.56 88.52,5.46 GND_POINTS.1 87.15,6.83 87.15,18.57 J1.1 | v69.93,28.17 70.08,28.02 70.08,25.88 U1.42 | v75.49,19.1 75.49,20.32 75.03,20.78 74.19,20.78 U1.29 | 88.06,27.48 87.15,27.48 J2.1 | 88.06,27.48 91.41,24.13 JP2.3 | v86.77,35.03 87.07,35.33 87.07,36.4 J3.1 | 88.06,27.48 88.06,37.85 87.15,38.76 87.15,39.75 J3.2 | 71.6,9.04 71.6,5.84 72.37,5.08 3.3VDC.2
  Bottom 0.203: AC1.1 79.91,20.24 79.91,20.47 79.38,21.01 78.61,21.01 78,20.4 78,20.24 AC1.3 78,20.17 78,19.94 79.98,17.96 79.98,14.99 C5.2 | C13.2 86,16.51 84.94,15.44 80.06,15.44 C5.2 | C19.2 61.32,2.49 61.47,2.49 62.46,1.5 65.35,1.5 66.34,2.49 C20.2 66.34,2.64 66.34,10.95 65.66,11.63 U2.4 65.66,11.79 65.66,12.32 U2.3 65.73,12.39 66.34,12.39 66.65,12.7 C8.2 70.23,12.62 71.22,11.63 72.37,11.63 | 72.37,11.63 72.82,11.63 73.89,12.7 C9.2 75.34,12.7 76.4,11.63 77.85,11.63 78.08,11.86 78.08,12.93 79.98,14.83 C5.2 | IC1.9 71.3,31.29 70.92,31.29 IC1.8 70.92,31.37 70.92,31.45 69.93,32.44 62.92,32.44 | 62.92,32.44 60.71,32.44 59.72,31.45 C11.2 | 64.71,29.5 64.67,29.46 63.07,29.46 62.92,29.62 62.92,32.44 | 64.71,29.5 65.66,30.45 C4.2 | C10.2 69.85,24.36 67.53,26.68 | 64.71,29.5 67.53,26.68 | AC1.11 78.99,28.09 79.91,28.09 AC1.12 80.06,28.09 80.67,28.09 81.43,27.33 82.88,27.33 84.71,29.16 C12.2 84.71,29.23 84.71,32.59 83.03,34.27 83.03,35.18 80.82,37.39 80.29,37.39 79.76,37.92 79.76,38.46 J4.8 79.68,38.53 79.68,39.14 79.15,39.67 72.75,39.67 72.44,39.37 JP1.2 | C21.2 71.45,2.56 71.45,4.17 72.37,5.08 3.3VDC.2 | C22.2 79.02,2.56 75.11,2.56 72.67,5 72.44,5 3.3VDC.2 | 67.53,26.68 69.01,28.17 v69.93,28.17 | 72.37,11.63 72.37,5.16 3.3VDC.2
  pour Route2: 1.27,41.91 93.98,41.91 93.98,0 1.27,0

## Text on the board
Top: NSASPOOK@NSASPOOK.COM | CAN-FD ON | PIC32MK-CANFD HOST V1.7